# Altium PCB omnibothub-debug.PcbDoc
Units mil, origin at the board's own origin, x right, y up, seen from the top; angles counter-clockwise.
Board outline 494.09 x 1092.84 mil, 4 copper layers (Top Layer, Mid-Layer 1, Mid-Layer 2, Bottom Layer); 10 components, 10 nets, 40 pads, 14 vias.
Unrouted connection lines stored in the file: 1.
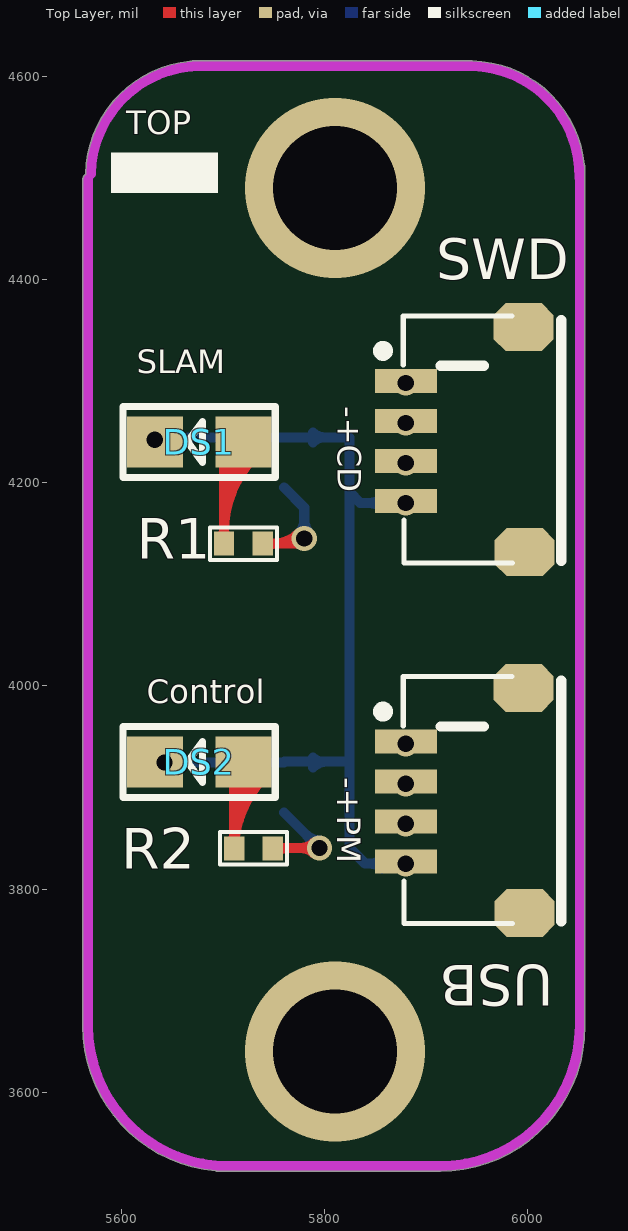
[diagram p0: Top Layer view]
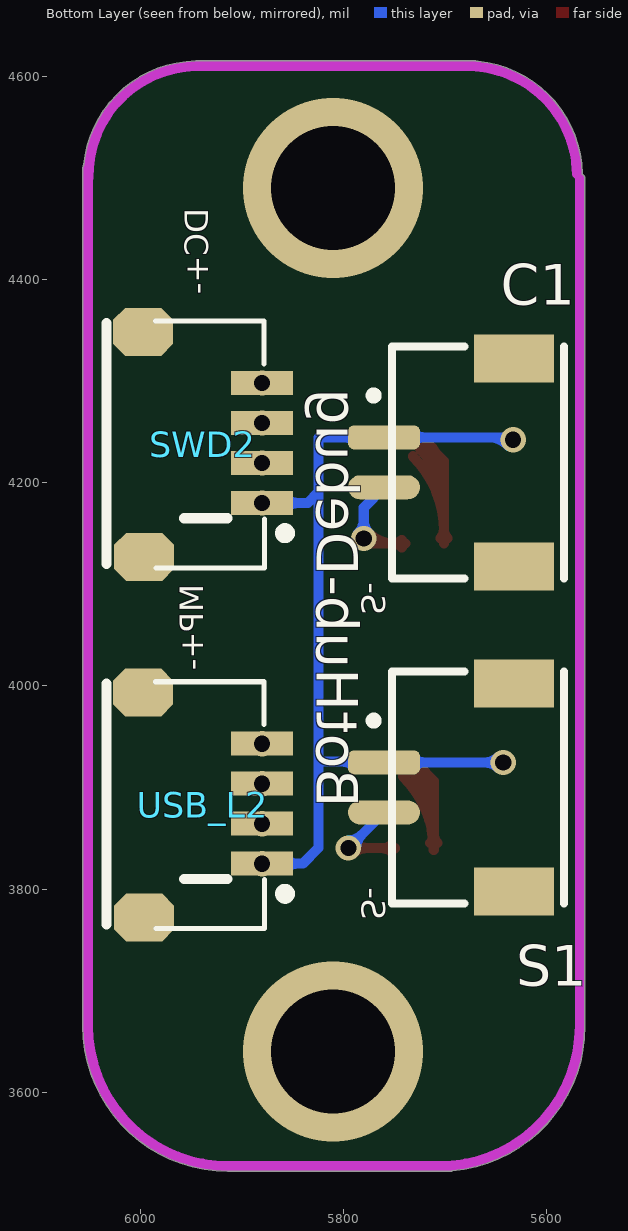
[diagram p1: Bottom Layer view, seen from below]

## Layer stack, top to bottom
Top Layer: signal copper 1.4
Dielectric: dielectric 12.6, FR-4, Dk 4.8
Mid-Layer 1: signal copper 1.4
Dielectric: dielectric 12.6, FR-4, Dk 4.8
Mid-Layer 2: signal copper 1.4
Dielectric: dielectric 12.6, FR-4, Dk 4.8
Bottom Layer: signal copper 1.4

## Board outline
5562.19,3665 5562.19,4499.04 cw(c5567.2,4499.04) 5564.94,4503.51 cw(c5569.92,4504.04) 5564.91,4504.13 cw(c5677.94,4501.98) 5667.62,4614.56 cw(c5669.7,4610) 5669.7,4615.02 5675.84,4615.02 cw(c5677.94,4501.98) 5680.05,4615.02 cw(c5677.94,4501.98) 5680.1,4615.01 5680.05,4615.02 5945,4615.02 cw(c5945,4610) 5945.1,4615.01 cw(c5942.94,4501.98) 6055.49,4512.7 cw(c6051.26,4510) 6056.27,4510 6056.27,3665 cw(c5913.46,3665) 5913.46,3522.19 5695,3522.19 cw(c5695,3527.2) 5692.77,3522.71 cw(c5705,3665)

## Design rules (kind name [scope] priority, off if disabled: settings)
Clearance Clearance_3 [(InPolygon) vs InNet('VCC_DJ')] p1: gap=30
Clearance Clearance_2 [(InPolygon) vs InNet('POWER')] p2: gap=30
Clearance Clearance_1 [(InPolygon)] p3: gap=10
Clearance [All] p4: gap=6
PolygonConnect [All] p1: connectstyle=Relief reliefconductorwidth=10 reliefentries=4 polygonreliefangle="90 Angle"
RoutingVias [All] p1: holewidth=28 width=50 viastyle="Through Hole" minholewidth=16 minwidth=25 maxholewidth=28 maxwidth=50
SilkscreenOverComponentPads [All] p1: minsilkscreentomaskgap=10
SolderMaskExpansion [All] p1: expansion=4
TestPointUsage FabricationTestPointUsage [All] p1: valid=0 allowmultiple=FALSE
Testpoint FabricationTestpoint [All] p1: side=3 testpointundercomponent=TRUE minsize=40 maxsize=100 preferedsize=60 minholesize=0 maxholesize=40 preferedholesize=32 testpointgrid=1 style=297 order=0-112345678
Width [All] p1: maxlimit=100 minlimit=10 preferedwidth=10 midlayer1_maxwidth=80 midlayer2_maxwidth=80 minimp=50.000000 maximp=50.000000 favimp=50.000000
23 further rules are at their usual default settings.

## Components (designator, comment, footprint, x,y, rotation, side; value= is the part's Value field where it differs from the comment)
C1 "Header 2" GH1.25-2P 5760,4220 r270 bottom (schematic designator LED_C1)
DS1 "LED1" SMDLED 5720,4240 r180 top
DS2 "LED1" SMDLED 5720,3925 r180 top
R1 "100R" "R 0402" 5720,4140 r180 top
R2 "100R" "R 0402" 5730,3840 r180 top
S1 "Header 2" GH1.25-2P 5760,3900 r270 bottom (schematic designator LED_S1)
SWD "Header 4" "SH1.0-4P - UP" 5880,4300 r270 top (schematic designator SWD1)
SWD2 "Header 4" "SH1.0-4P - up" 5880,4180 r90 bottom
USB "Header 4" "SH1.0-4P - UP" 5880,3945 r270 top (schematic designator USB_L1)
USB_L2 "Header 4" "SH1.0-4P - up" 5880,3825 r90 bottom

## Footprints (in the part's own frame and the unit in brackets; to place one, negate y for a bottom-side part, rotate by r counter-clockwise, add the part's x,y. Pads: shape width x height; smd on the part's side, far side on the other; paste and mask are expansions set on the pad)
GH1.25-2P [mm]
  rrect50% 0.6x1.8 smd: 1(-0.625,0)
  oval 0.6x1.8 smd: 2(0.625,0)
  rect 1.2x2 smd: A(-2.6,3.246) A(2.6,3.246)
  silkscreen extent -2.9,-0.33 2.9,4.5
"R 0402" [mil]
  rect 20x23.62 smd: 1(-19,0) 2(19,0)
  silkscreen extent -33,-16 33,16
"SH1.0-4P - UP" [mm]
  rect 0.6x1.55 smd: 1(0,0) 2(1,0) 3(2,0) 4(3,0)
  oct 1.2x1.5 smd: 1.(4.279,2.972) A(-1.346,2.946)
  silkscreen extent -1.63,-0.7 4.55,3.89
"SH1.0-4P - up" [mm]
  rect 0.6x1.55 smd: 1(0,0) 2(1,0) 3(2,0) 4(3,0)
  oct 1.2x1.5 smd: 1.(4.279,2.972) A(-1.346,2.946)
  silkscreen extent -1.63,-0.7 4.55,3.89
SMDLED [mm]
  rect 1.4x1.27 smd: 1(0.001,-0.002) 2(2.211,-0.002)
  silkscreen extent -0.8,-0.89 3.01,0.89

## Part data
C1 S1: "Header, 2-Pin"
DS1 DS2: library part LED2, "Typical RED, GREEN, YELLOW, AMBER GaAs LED"
R1 R2: library part Res2, "0603"
SWD SWD2 USB USB_L2: "Header, 4-Pin"

## Via types
v1: diameter 25, hole 16, Top Layer to Bottom Layer, 12 vias
v2: diameter 177.17, hole 122.05, Top Layer to Bottom Layer, 2 vias

## Nets (pads, with @x,y where several pads share a name; then routed paths per layer and width w, separated by ;. In a path a pad name is that pad's centre, name@x,y a point inside that pad or via, vN(x,y) a via of type N, cw(c..) or ccw(c..) an arc to the next point about the centre after c; other vN are vias at no path point)
5V: SWD2.2 SWD.3 USB.3 USB_L2.2
  other v1: 5880,3864.37 5880,4219.37
DM: USB.1 USB_L2.4
  other v1: 5880,3943.11
DP: USB.2 USB_L2.3
  other v1: 5880,3903.74
GND: C1.1 DS1.2 DS2.2 S1.1 SWD2.1 SWD.4 USB.4 USB_L2.1 | length 1161.8
  Bottom Layer w10: v1(5632.96,4242.17) 5635.39,4244.61 C1.1 5824.61,4244.61 5824.61,4190.39 ; v1@5638.26,4236.87 cw(c5656.94,4218.19) 5656.94,4244.61 ; v1(5642.5,3924.61) S1.1 5760.79,3925.39 5824.61,3925.39 ; v1@5647.81,3919.3 cw(c5660.61,3906.5) 5660.61,3924.61 cw(c5660.61,3942.71) v1@5647.81,3929.91 ; S1.1@5731.56,3919.79 ccw(c5719.93,3908.16) 5719.93,3924.61 ccw(c5719.93,3941.05) S1.1@5731.56,3929.42 ; C1.1@5731.56,4239.79 ccw(c5719.93,4228.16) 5719.93,4244.61 ccw(c5719.93,4261.05) C1.1@5731.56,4249.42 ; S1.1@5788.44,3919.79 cw(c5801.97,3906.26) 5801.97,3925.39 ; S1.1@5788.44,3929.42 ccw(c5798.16,3939.15) 5798.16,3925.39 ; C1.1@5788.44,4239.79 cw(c5800.07,4228.16) 5800.07,4244.61 cw(c5800.07,4261.05) C1.1@5788.44,4249.42 ; USB_L2.1@5856.48,3820.18 ccw(c5844.86,3808.56) 5844.86,3825 ccw(c5844.86,3841.44) USB_L2.1@5856.48,3829.82 ; SWD2.1@5856.48,4175.18 ccw(c5844.86,4163.56) 5844.86,4180 ccw(c5844.86,4196.44) SWD2.1@5856.48,4184.82 ; USB_L2.1@5874.7,3819.7 ccw(c5861.89,3806.89) 5861.89,3825 ccw(c5861.89,3843.11) USB_L2.1@5874.7,3830.3 ; SWD2.1@5874.7,4174.7 ccw(c5861.89,4161.89) 5861.89,4180 ccw(c5861.89,4198.11) SWD2.1@5874.7,4185.3 ; v1(5880,3825) 5840,3825 5824.61,3840.39 5824.61,3925.39 ; v1(5880,4180) 5835,4180 5824.61,4190.39 ; 5824.61,3925.39 5824.61,4190.39
LED1: C1.2 R1.1 | length 176.8
  Top Layer w10: R1.1 5775,4140 v1(5780,4145) ; R1.1@5742.54,4136.46 cw(c5751.07,4127.93) 5751.07,4140 cw(c5751.07,4152.07) R1.1@5742.54,4143.54 ; 5749.82,4140 ccw(c5749.82,4175.18) v1@5774.7,4150.3
  Bottom Layer w10: C1.2 5780,4175.39 v1(5780,4145) ; v1@5774.7,4150.3 ccw(c5761.89,4163.11) 5780,4163.11 ccw(c5798.11,4163.11) v1@5785.3,4150.3
LED2: R2.1 S1.2 | length 171.5
  Top Layer w10: R2.1 5749.39,3840.39 v1(5795,3840.39) ; R2.1@5752.54,3836.46 cw(c5762.02,3826.98) 5762.02,3840.39 ; R2.1@5752.54,3843.54 ccw(c5760.12,3851.12) 5760.12,3840.39 ; v1@5789.7,3835.09 ccw(c5776.89,3822.29) 5776.89,3840.39 ccw(c5776.89,3858.5) v1@5789.7,3845.7
  Bottom Layer w10: S1.2 v1(5795,3840.39) ; v1@5787.5,3840.39 ccw(c5769.39,3840.39) 5782.2,3853.2 ccw(c5795,3866) v1@5795,3847.89
NetDS1_1: DS1.1 R1.2 | length 315.8
  Top Layer w10: R1.2@5697.46,4145.35 ccw(c5688.93,4153.88) 5701,4153.88 ccw(c5713.07,4153.88) R1.2@5704.54,4145.35 ; R1.2 5701,4221.1 DS1.1 ; 5701,4152.16 cw(c5805.31,4152.16) DS1.1@5731.55,4225.92 ; 5701,4176.31 cw(c5781.17,4176.31) DS1.1@5724.48,4232.99 ; 5701,4200.45 cw(c5757.02,4200.45) DS1.1@5717.41,4240.06
NetDS2_1: DS2.1 R2.2 | length 298
  Top Layer w10: R2.2@5707.46,3845.35 ccw(c5698.93,3853.88) 5711,3853.88 ccw(c5723.07,3853.88) R2.2@5714.54,3845.35 ; R2.2@5711,3838.44 cw(c5812.26,3838.44) DS2.1@5741.4,3910.78 ; R2.2 5711,3906.1 DS2.1@5729.97,3925.06 ; 5711,3862.23 cw(c5788.96,3862.23) DS2.1@5734.41,3917.92 ; 5711,3886.02 cw(c5765.65,3886.02) DS2.1@5727.41,3925.06
SCLK_FC: SWD2.3 SWD.2
  other v1: 5880,4258.74
SWD_FC: SWD2.4 SWD.1
  other v1: 5880,4298.11
pads on no net: C1.A S1.A SWD2.1. SWD2.A SWD.1. SWD.A USB.1. USB.A USB_L2.1. USB_L2.A
copper on no net:
  other v2: 5810,3640 5810,4490

## Keep-outs
Keep-Out Layer:
  lines w10: 5567.2,4499.04 5567.2,3665 ccw(c5705,3665) 5705,3527.2 ; 5569.92,4504.04 cw(c5677.94,4501.98) 5680,4610 ; 5669.7,4610 5945,4610 cw(c5942.94,4501.98) 6050.96,4499.92 ; 5695,3527.2 5913.46,3527.2 ccw(c5913.46,3665) 6051.26,3665 6051.26,4510

## Silkscreen, mask and mechanical layers (free items; w line width, h text height)
Top Overlay:
  rectangle: 5590,4485 5695,4525
  text "TOP" at 5605,4535 h40
  text "SLAM" at 5615,4300 h40
  text "-+CD" at 5805,4275 h40 r270
  text "Control" at 5625,3975 h40
  text "-+PM" at 5804.59,3910 h40 r270
Bottom Overlay:
  text "DC+-" at 5925,4470 h40 r270
  text "MP+-" at 5930,4100 h40 r270
  text "S-" at 5790,4070 h40 r90
  text "BotHub-Debug" at 5840,3880 h70 r90
  text "S-" at 5790,3770 h40 r90